# EAGLE board PPS_schematic (EAGLE 9.6.2)
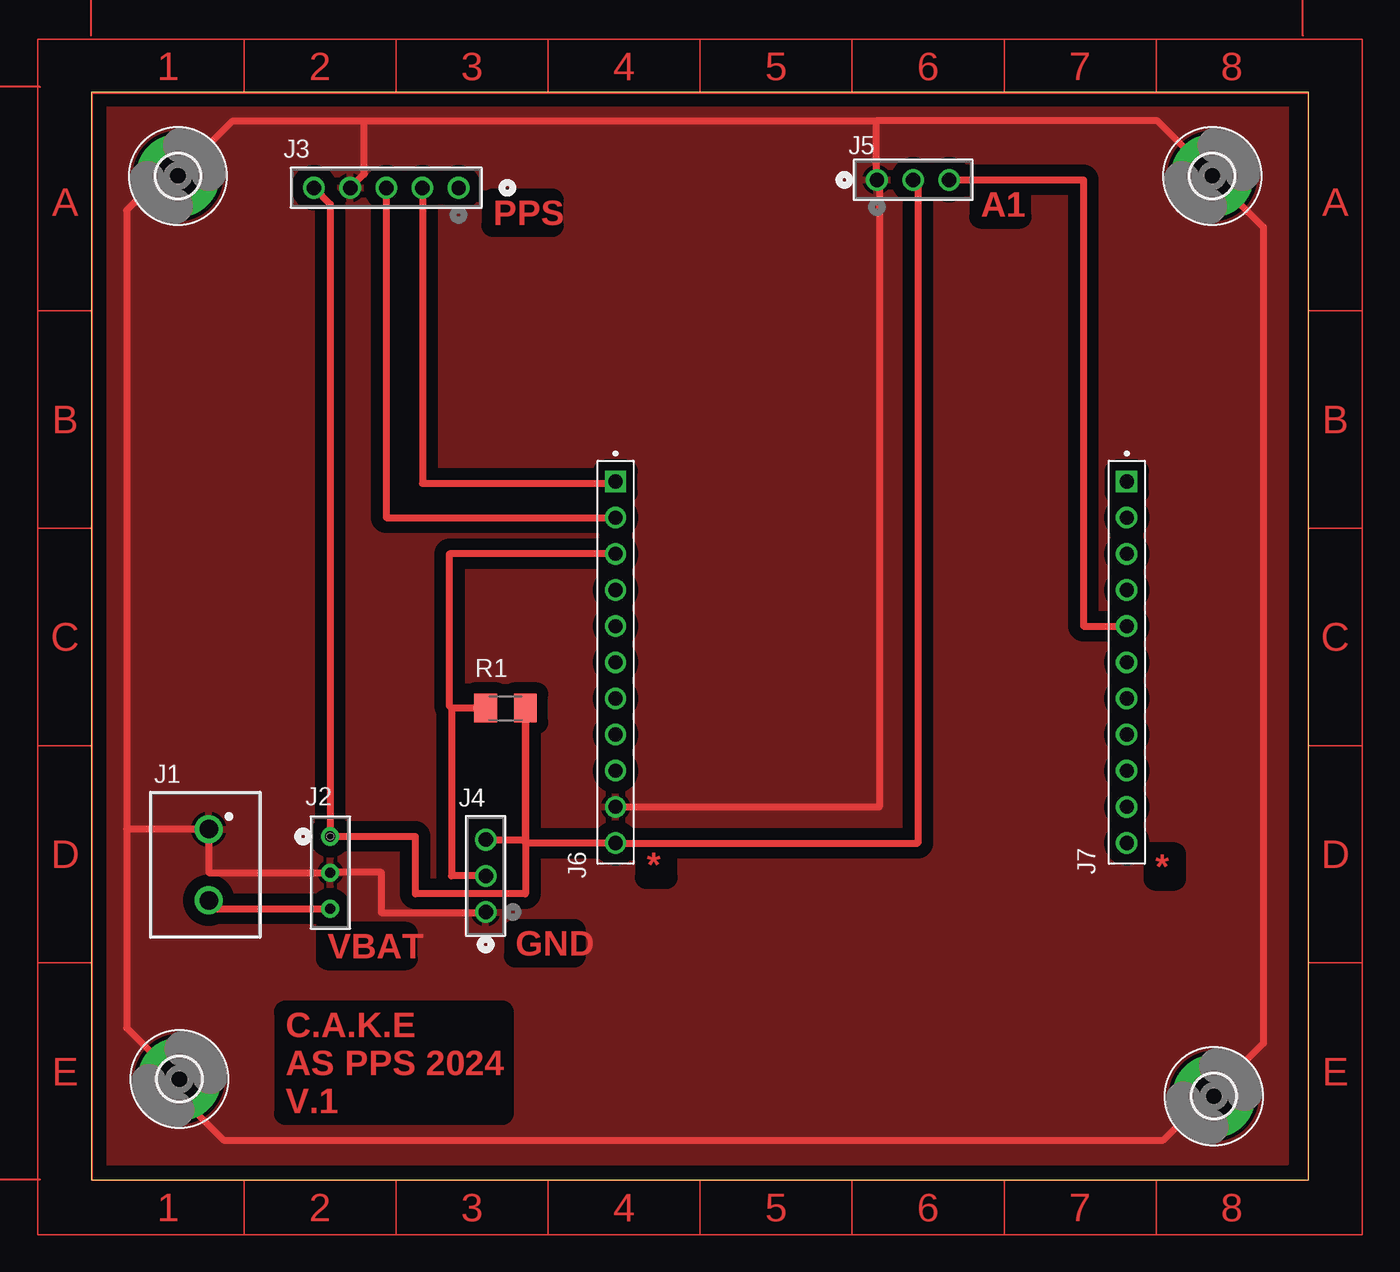
[diagram p0: board, top side]
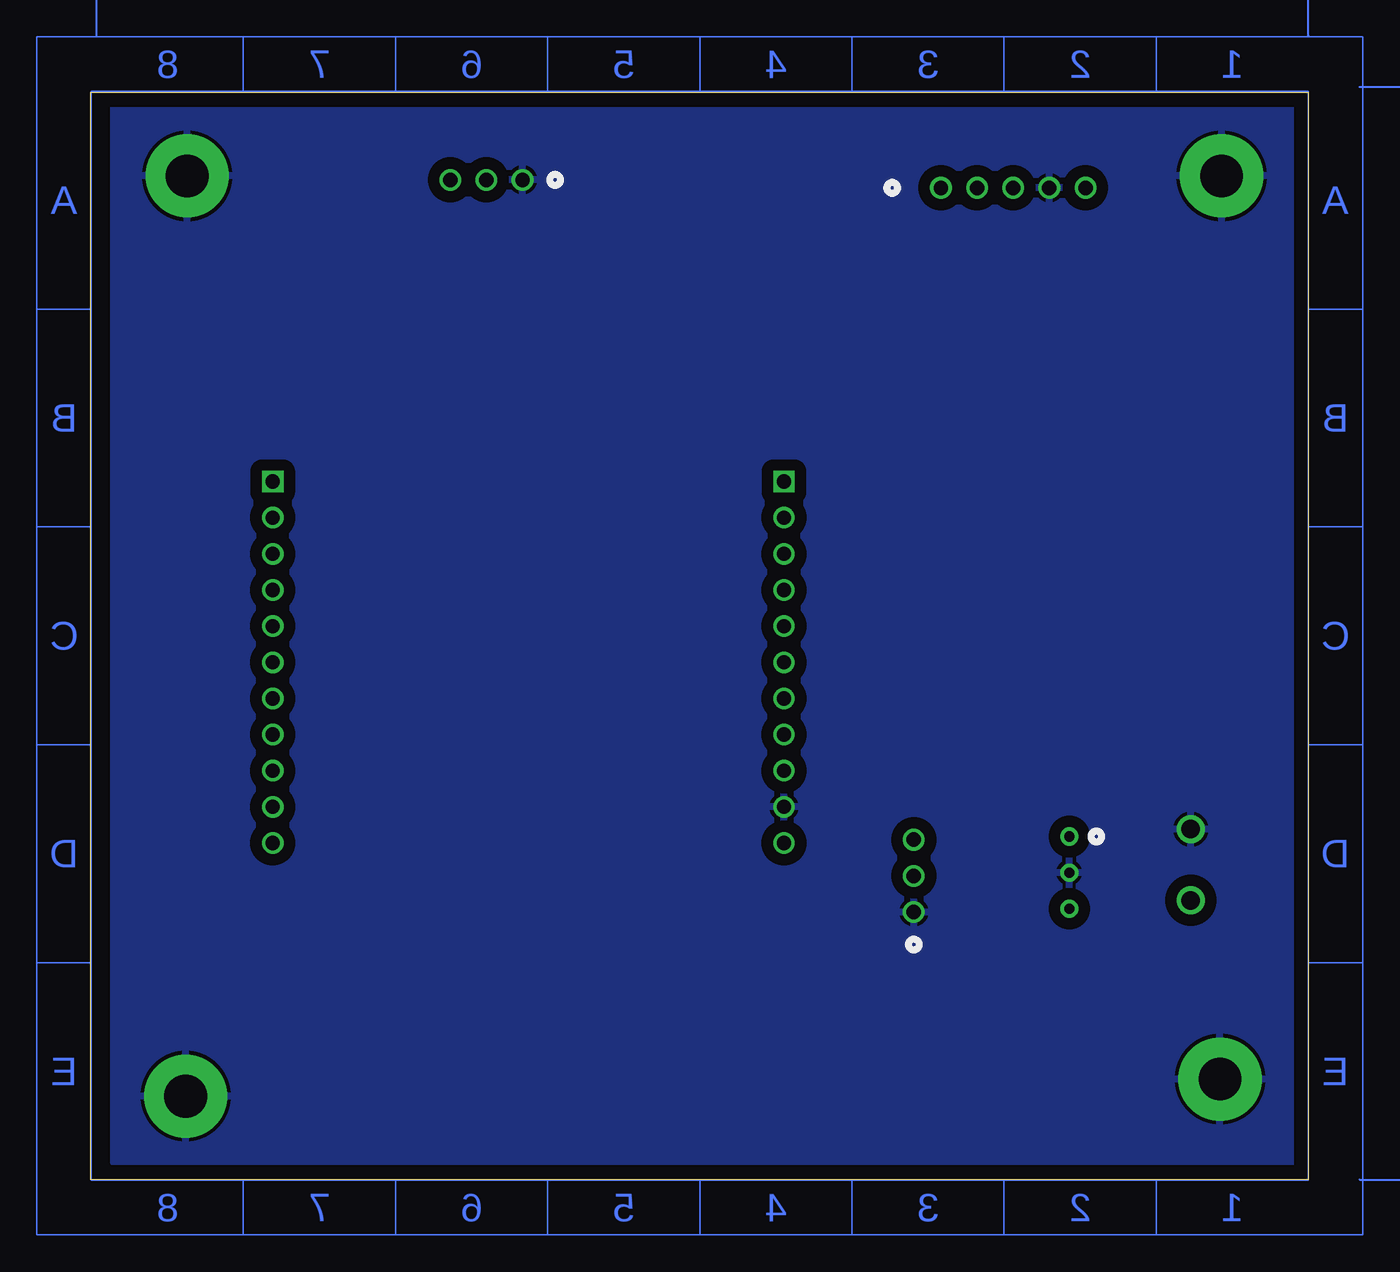
[diagram p1: board, bottom side, seen from below]

Size 85.6 x 76.4 mm. Coordinates in mm from the lower left corner, seen from the top.
Outline: 0,0 85.6,0 85.6,76.4 0,76.4 0,0
Copper layers (1*16): Top 0.035mm / dielectric 1.5mm / Bottom 0.035mm
Design rules "TSO": minimum track width 6mil, minimum drill 0.35mm, track to track 6mil, track to pad 6mil, pad to pad 6mil, via to via 6mil, smd to smd 6mil, copper to edge 40mil, drill to drill 6mil, minimum pad ring 10mil, minimum via ring 8mil, stop-mask expansion 4mil, vias tented up to drill 0mil, thermal gap 10mil

## Footprints (pad centres in the part's own frame; a part is rotated, then mirrored left to right if it is on the bottom)
3,0-PAD = drill 3 pad 5.842: B3,0 0,0
691137710002 = drill 1.3: 1 -2.5,0; 2 2.5,0
CON3_1X3_TU_HTS_SAI = drill 0.711 pad 1.27: 1 -2.54,0; 2 0,0; 3 2.54,0
CONN5_1LFBN-RC_SUL = drill 1.016 pad 1.524: 1 0,0; 2 2.54,0; 3 5.08,0; 4 7.62,0; 5 10.16,0
CONN_PPTC031_SUL = drill 1.016 pad 1.524: 1 0,0; 2 -2.54,0; 3 -5.08,0
HARWIN_M20-7821146 = drill 1 square: 1 12.7,0 | drill 1: 2 10.16,0; 3 7.62,0; 4 5.08,0; 5 2.54,0; 6 0,0; 7 -2.54,0; 8 -5.08,0; 9 -7.62,0; 10 -10.16,0; 11 -12.7,0
M1206 = smd 1.6 x 2: 1 -1.4,0; 2 1.4,0

## Placement (x,y rotation side)
H1  MOUNT-PAD-ROUND3.0  [3,0-PAD]  6.11,70.54 0 top
H2  MOUNT-PAD-ROUND3.0  [3,0-PAD]  78.82,70.54 0 top
H3  MOUNT-PAD-ROUND3.0  [3,0-PAD]  6.22,7.07 0 top
H4  MOUNT-PAD-ROUND3.0  [3,0-PAD]  78.93,5.87 0 top
J1  Batterie  [691137710002]  8.28,22.13 270 top
J2  BOOSTER  [CON3_1X3_TU_HTS_SAI]  16.82,21.58 270 top
J3  NEO-6M  [CONN5_1LFBN-RC_SUL]  25.84,69.7 180 top
J4  DS18B20  [CONN_PPTC031_SUL]  27.74,18.81 270 top
J5  D0_METTER_v3.0  [CONN_PPTC031_SUL]  55.25,70.26 180 top
J6  MADUINO_LORAWAN_ZÉRO  [HARWIN_M20-7821146]  36.87,36.36 90 top
J7  MADUINO_LORAWAN_ZÉRO  [HARWIN_M20-7821146]  72.82,36.36 90 top
R1  4.7k  [M1206]  29.14,33.13 180 top

## Library data of the parts
H1-H4 = holes
J1 = 691137710002; DATASHEET-URL: https://www.we-online.com/catalog/datasheet/691137710002.pdf; IR-UL: 16A; IR-VDE: 24A; MOUNT: THT; PART-NUMBER: 691137710002; PINS: 2; PITCH: 5mm; TYPE: Horizontal; WIRE: 12 to 30 (AWG) 3.31 to 0.05 (mm²); WORKING-VOLTAGE-UL: 300V(AC); WORKING-VOLTAGE-VDE: 250V(AC)
J2 = 2024-10-23_16-09-23_Library; COPYRIGHT: Copyright (C) 2024 Ultra Librarian. All rights reserved.; MANUFACTURER_PART_NUMBER: TS-103-T-A; MFR_NAME: Samtec Inc
J3 = 2024-10-31_13-50-36_Library; COPYRIGHT: Copyright (C) 2024 Ultra Librarian. All rights reserved.; MANUFACTURER_PART_NUMBER: PPTC051LFBN-RC; MFR_NAME: Sullins
J4 J5 = 2024-10-23_16-02-51_Library; COPYRIGHT: Copyright (C) 2024 Ultra Librarian. All rights reserved.; MANUFACTURER_PART_NUMBER: PPTC031LFBN-RC; MFR_NAME: Sullins
J6 J7 = M20-7821146; MANUFACTURER: HARWIN; STANDARD: Manufacturer Recommendations
R1 = 1_TGE

## Nets
3V3: J6.9
A0: J7.6
A1: J5.3 J7.5
A2: J7.4
A3: J7.3
A4: J7.2
A5: J7.1
D2: J3.2 J6.1
D3: J3.3 J6.2
D4: J4.2 J6.3 R1.2
D5: J6.4
D6: J6.5
D7: J6.6
D8: J6.7
D9: J6.8
D10: J7.7
D11: J7.8
D12: J7.9
D13: J7.10
GND: H1.B3,0 H2.B3,0 H3.B3,0 H4.B3,0 J1.1 J2.2 J3.4 J4.1 J5.1 J6.10
PPS: J3.1
RST: J7.11
VBAT: J1.2 J2.3
VCC: J2.1 J3.5 J4.3 J5.2 J6.11 R1.1

## Tracks (layer width: path | path; a pad name or v marks a point on that pad's centre or on a via)
A1
  Top 0.508: J7.5 69.78,38.9 69.78,70.26 J5.3
D2
  Top 0.508: J6.1 36.74,48.93 23.3,48.93 J3.2
D3
  Top 0.508: J3.3 20.76,46.52 J6.2
D4
  Top 0.508: J6.3 25.2,43.98 25.2,33.28 25.34,33.13 | R1.2 25.34,33.13 | 25.34,33.13 25.34,21.35 J4.2
GND
  Top 0.508: 2.49,24.63 2.49,68.12 4.91,70.54 H1.B3,0 9.97,74.4 19.2,74.4 | 2.49,24.63 J1.1 8.28,21.58 J2.2 16.84,21.6 20.4,21.6 20.4,18.76 27.69,18.76 J4.1 | 2.49,24.63 2.49,10.68 6.1,7.07 H3.B3,0 6.22,5.87 9.31,2.78 75.37,2.78 78.69,6.11 78.82,5.98 | J6.10 55.41,26.2 55.41,70.1 J5.1 55.2,70.31 55.2,74.4 | 78.82,5.98 H4.B3,0 | 19.2,74.4 55.2,74.4 | 55.2,74.4 74.96,74.4 H2.B3,0 82.42,66.94 82.42,9.58 78.82,5.98 | J3.4 19.2,70.68 19.2,74.4
  pour Top (isolate 0.813): 1.2,75.6 1.2,1.2 84,1.2 84,75.6
  pour Bottom (isolate 0.813): 1.2,75.6 1.2,1.2 84,1.2 84,75.6
VBAT
  Top 0.508: J2.3 8.87,19.04 J1.2
VCC
  Top 0.508: J5.2 58.13,69.92 58.13,23.66 J6.11 30.54,23.66 R1.1 30.54,24 | 30.54,24 30.54,20.09 22.8,20.09 22.8,24.12 J2.1 16.82,68.56 J3.5 | 30.54,24 30.43,23.89 J4.3
(copper drawn outside any net)
  shapes: Bottom area x3, Top area x3

## Text on the board
Top: PPS | A1 | * | * | VBAT | GND | C.A.K.E / AS PPS 2024 / V.1